# EAGLE board Lightbox schematic_06NOV (EAGLE 9.2.0)
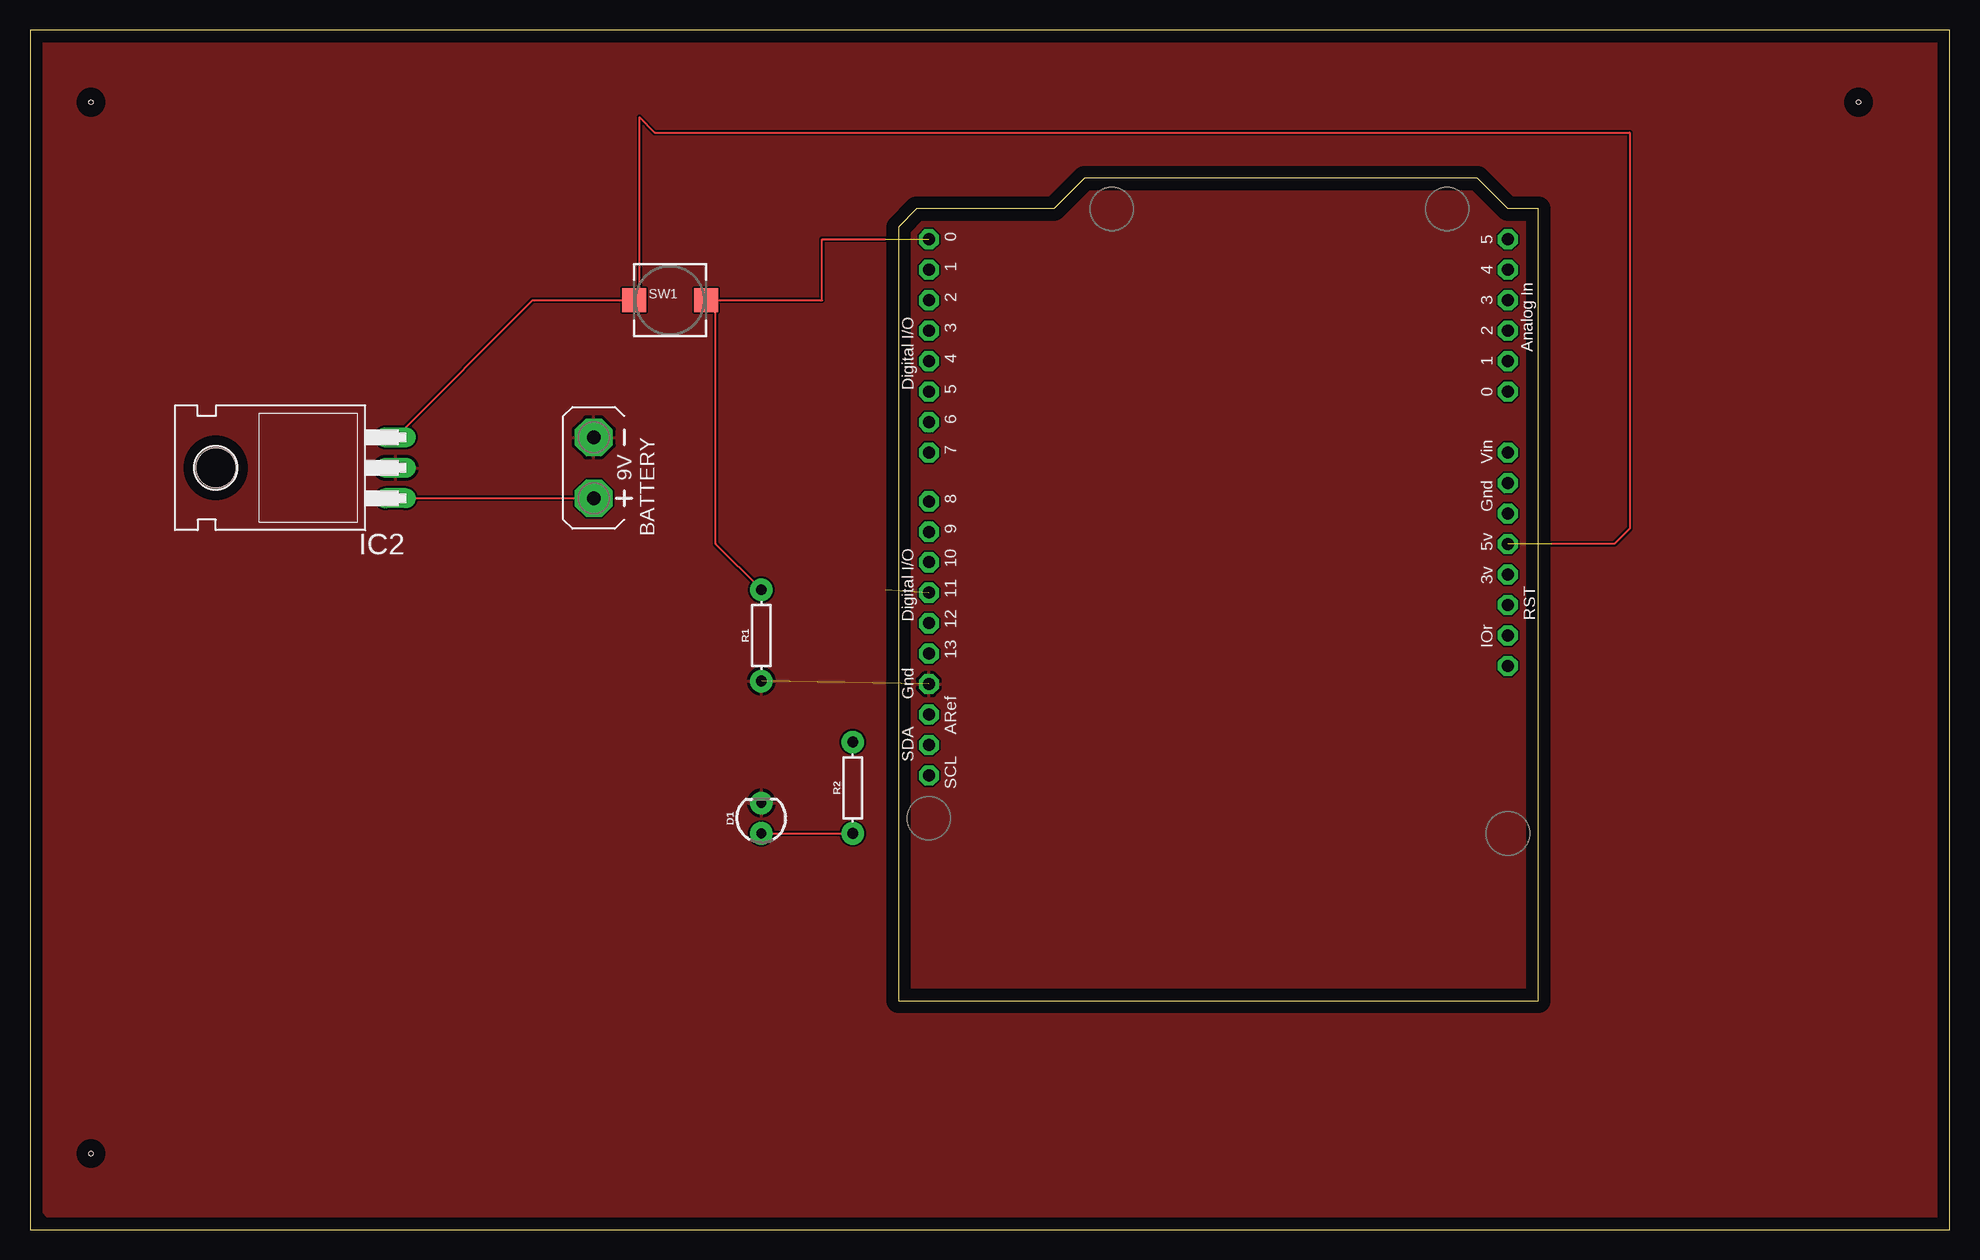
[diagram p0: board, top side]
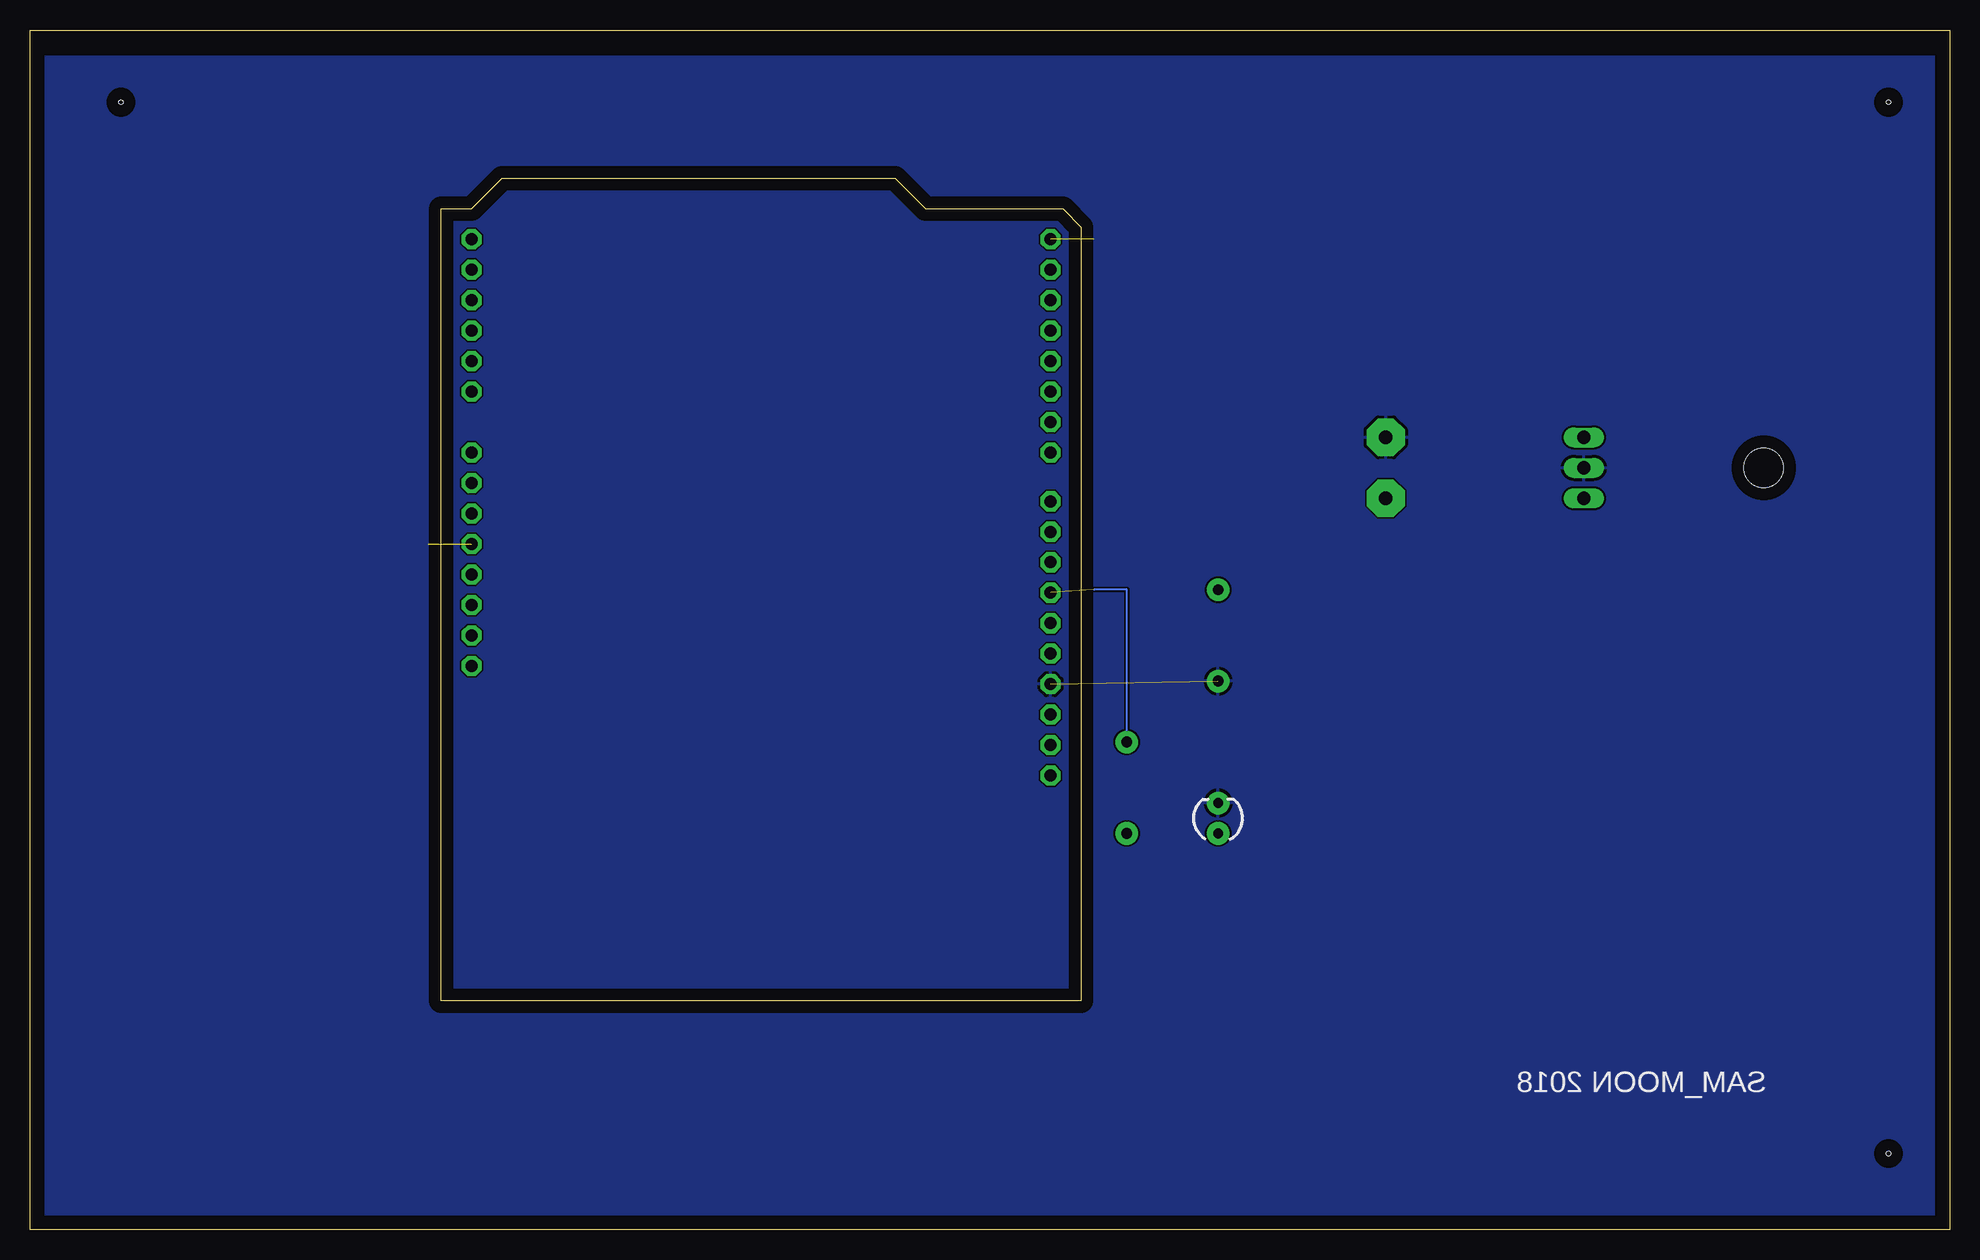
[diagram p1: board, bottom side, seen from below]

Size 160 x 100 mm. Coordinates in mm from the lower left corner, seen from the top.
Outline: 0,0 160,0 160,100 0,100 0,0
Copper layers (1*16): Top 0.035mm / dielectric 1.5mm / Bottom 0.035mm
Design rules "default": minimum track width 6mil, minimum drill 0.35mm, track to track 6mil, track to pad 6mil, pad to pad 6mil, via to via 6mil, smd to smd 6mil, copper to edge 40mil, drill to drill 6mil, minimum pad ring 10mil, minimum via ring 8mil, stop-mask expansion 4mil, vias tented up to drill 0mil, thermal gap 10mil
Holes 0.35 mm at 5.08,6.35 5.08,93.98 152.4,93.98

## Footprints (pad centres in the part's own frame; a part is rotated, then mirrored left to right if it is on the bottom)
AB9V = drill 1.118 pad 3.15 octagon: + 0,2.54; - 0,-2.54
LED_3MM = drill 0.813 pad 1.88: A -1.27,0; K 1.27,0
TO220H = drill 1.118 long: 1 -2.54,-10.16; 2 0,-10.16; 3 2.54,-10.16 | hole 3.302: 0,4.826
AXIAL-0.3 = drill 0.9 pad 1.88: P$1 -3.81,0; P$2 3.81,0
PUSHBUTTON_SMD_SJ = smd 2 x 2: P$1 3,0; P$2 -3,0
ARDUINOR3 = drill 1 pad 1.676 octagon: 3V 35.56,2.54; 5V 38.1,2.54; A0 50.8,2.54; A1 53.34,2.54; A2 55.88,2.54; A3 58.42,2.54; A4 60.96,2.54; A5 63.5,2.54; AREF 23.876,50.8; D0 63.5,50.8; D1 60.96,50.8; D2 58.42,50.8; D3 55.88,50.8; D4 53.34,50.8; D5 50.8,50.8; D6 48.26,50.8; D7 45.72,50.8; D8 41.656,50.8; D9 39.116,50.8; D10 36.576,50.8; D11 34.036,50.8; D12 31.496,50.8; D13 28.956,50.8; GND 26.416,50.8; GND1 43.18,2.54; GND2 40.64,2.54; IOREF 30.48,2.54; RESERVED 27.94,2.54; RESET 33.02,2.54; SCL 18.796,50.8; SDA 21.336,50.8; VIN 45.72,2.54

## Placement (x,y rotation side)
BATTERY  AB9V  [AB9V]  46.99,63.5 180 top
D1  [LED_3MM]  60.96,34.29 90 top
IC2  7805T  [TO220H]  20.32,63.5 90 top
R1  100k  [AXIAL-0.3]  60.96,49.53 90 top
R2  100k  [AXIAL-0.3]  68.58,36.83 90 top
SW1  [PUSHBUTTON_SMD_SJ]  53.34,77.47 0 top
U1  ARDUINOR3-DIMENSION  [ARDUINOR3]  125.73,19.05 90 top

## Library data of the parts
BATTERY = battery
D1 = SparkFun-LED; PROD_ID: DIO-08794
IC2 = linear
R1 R2 = SparkFun-Resistors; PROD_ID: RES-12184
SW1 U1 = adafruit

## Nets
3V: U1.3V
+5V: IC2.3 SW1.P$2 U1.5V
GND: BATTERY.- D1.K IC2.2 R1.P$1 U1.GND
GND1: U1.GND1
GND2: U1.GND2
N$1: BATTERY.+ IC2.1
N$2: R1.P$2 SW1.P$1 U1.D0
N$3: R2.P$2 U1.D11
N$4: D1.A R2.P$1
VIN: U1.VIN

## Tracks (layer width: path | path; a pad name or v marks a point on that pad's centre or on a via)
+5V  (1 unrouted)
  Top 0.152: IC2.3 41.91,77.47 SW1.P$2 50.8,77.47 50.8,92.71 52.07,91.44 133.35,91.44 133.35,58.42 132.08,57.15 126.82,57.15
GND  (1 unrouted)
  pour Bottom: 1.27,97.79 158.75,97.79 158.75,1.27 1.27,1.27
  pour Top: 1.27,99.06 160.02,99.06 160.02,1.27 158.75,0 2.54,0 0,2.54 0,97.79
N$1
  Top 0.152: IC2.1 BATTERY.+ 48.26,60.96
N$2  (1 unrouted)
  Top 0.152: SW1.P$1 57.15,77.47 | 57.15,77.47 66.04,77.47 66.04,82.55 71.3,82.55 | R1.P$2 57.15,57.15 57.15,77.47
N$3  (1 unrouted)
  Bottom 0.152: R2.P$2 68.58,53.34 71.3,53.34
N$4
  Top 0.152: D1.A R2.P$1

## Text on the board
_bsilk: SAM_MOON 2018